# Altium PCB ММС 3К T9M.pcbdoc
Units mm, origin at the board's own origin, x right, y up, seen from the top; angles counter-clockwise.
Board outline 110 x 14 mm, 2 copper layers (Top Layer, Bottom Layer), stack 1.57 mm thick; 122 components, 71 nets, 332 pads, 66 vias.
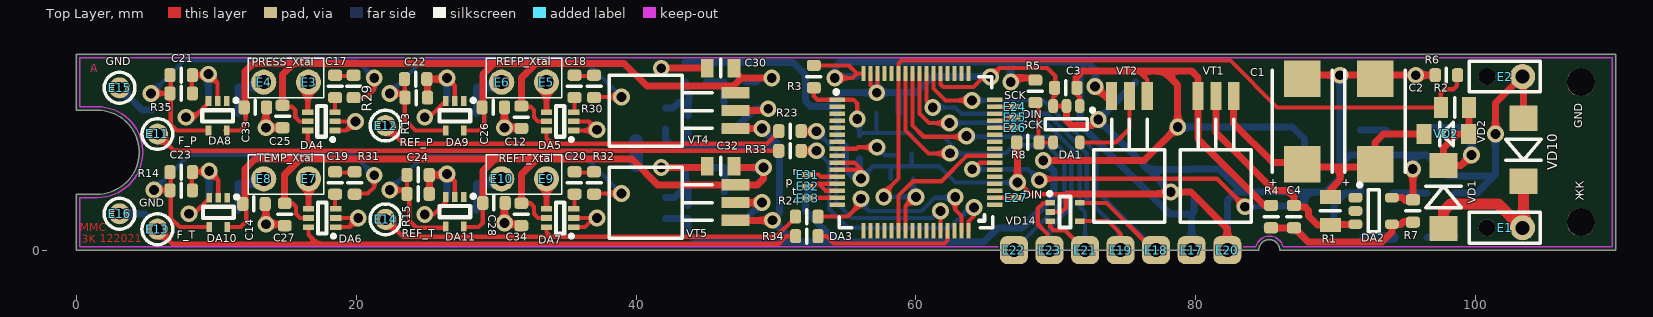
[diagram p0: Top Layer view]
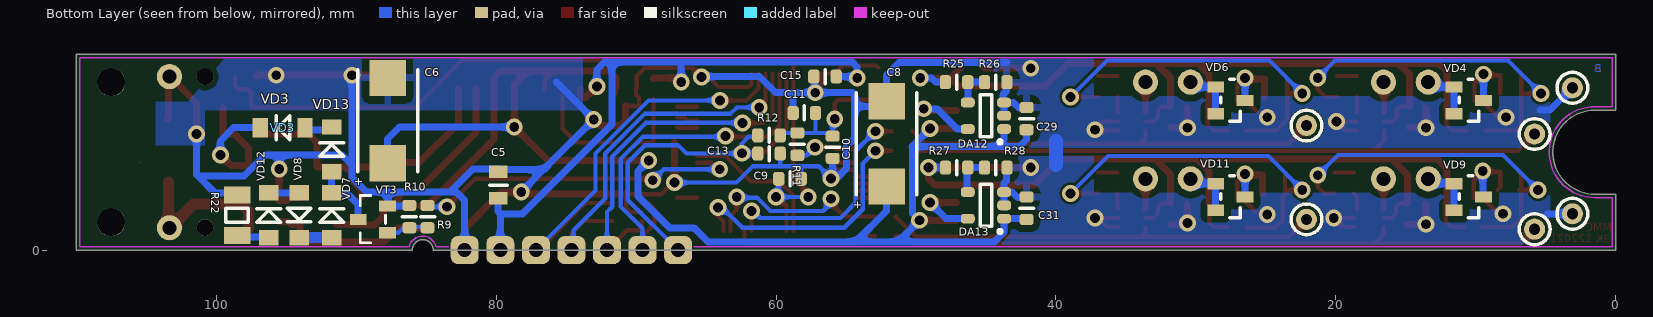
[diagram p1: Bottom Layer view, seen from below]
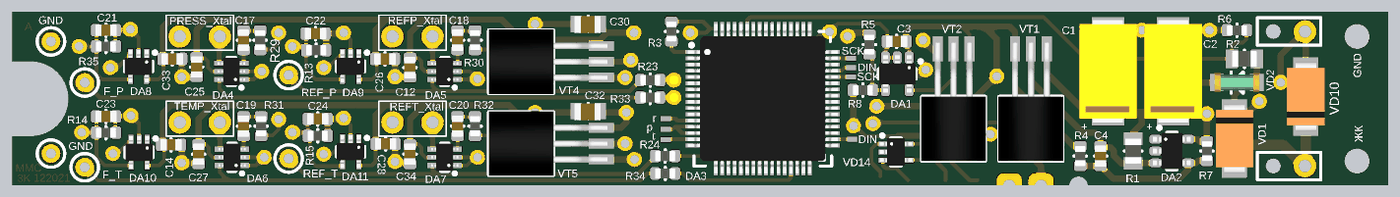
[diagram p2: 3D render of the assembled board from above, using the file's embedded part models]
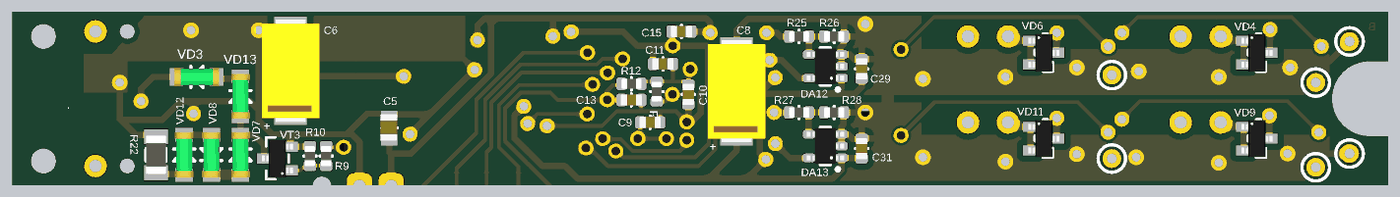
[diagram p3: 3D render of the assembled board from below, using the file's embedded part models]

## Layer stack, top to bottom
Top Solder: solder mask 0.0102, Solder Resist, Dk 3.5
Top Layer: signal copper 0.035
Dielectric1: core 1.5, FR-4, Dk 4.2
Bottom Layer: signal copper 0.035
Bottom Solder: solder mask 0.0102, Solder Resist, Dk 3.5

## Board outline
0,0 0,4 1.5,4 ccw(c1.5,7) 1.5,10 0,10 0,14 110,14 110,0 85.99,0 ccw(c85.24,0) 84.49,0

## Design rules (kind name [scope] priority, off if disabled: settings)
Clearance Clearance_Keepout [OnLayer('Keep-Out Layer')] p1: gap=0.01 ignorepadtopadclearanceinfootprint=FALSE
Clearance Clearance_poly [InNamedPolygon('BOTTOM_GND')] p2: gap=0.35 ignorepadtopadclearanceinfootprint=FALSE except(0.5: SMDPad-Poly)
Clearance Clearance_Top_Bot [(OnLayer('Top Layer') OR OnLayer('Bottom Layer'))] p3: gap=0.2 ignorepadtopadclearanceinfootprint=FALSE except(0: Arc-Hole Track-Hole SMDPad-Hole THPad-Hole Via-Hole Fill-Hole Poly-Hole Region-Hole Text-Hole; 0.5: SMDPad-Fill SMDPad-Poly SMDPad-Region THPad-Fill THPad-Poly THPad-Region)
Clearance Clearance_INTERNAL [(OnLayer('Signal Layer 1') OR OnLayer('Signal Layer 2'))] p4: gap=0.25 ignorepadtopadclearanceinfootprint=FALSE except(0: Arc-Hole Track-Hole SMDPad-Hole THPad-Hole Via-Hole Fill-Hole Poly-Hole Region-Hole Text-Hole)
Clearance "Clearance_Different nets" [All] p5: gap=0.2 ignorepadtopadclearanceinfootprint=FALSE except(0.5: SMDPad-Fill SMDPad-Poly SMDPad-Region)
Clearance "Clearance_Same net" [IsVia vs IsVia] p6: gap=0.3 ignorepadtopadclearanceinfootprint=FALSE except(0: Arc-Hole Track-Hole SMDPad-Hole THPad-Hole Via-Hole Fill-Hole Poly-Hole Region-Hole Text-Hole)
Clearance Clearance_PadtoPad [IsPAD vs IsPad] p7: gap=0.2 ignorepadtopadclearanceinfootprint=FALSE except(0: Arc-Hole Track-Hole SMDPad-Hole THPad-Hole Via-Hole Fill-Hole Poly-Hole Region-Hole Text-Hole)
ComponentClearance [All] p1: gap=0.2 collisioncheckmode=3 verticalgap=0.2 showdistances=FALSE
DiffPairsRouting DiffPairs_100Ohm [InDifferentialPairClass('All Differential Pairs')] p1: maxlimit=0.3 minlimit=0.3 mostfreqgap=0.3 toplayer_minwidth=0.381 toplayer_maxwidth=0.381 toplayer_prefwidth=0.381 bottomlayer_minwidth=0.381 bottomlayer_maxwidth=0.381 bottomlayer_prefwidth=0.381 maxuncoupledlength=12.7 // 100 Ohm differential traces
HoleSize [All] p1: absolutevalues=TRUE maxlimit=3.5 minlimit=0.025 maxpercent=80.000 minpercent=20.000
MinimumAnnularRing [All] p1: minimumring=0.1
MinimumSolderMaskSliver [All] p1 off: minsoldermaskwidth=0.1
PlaneClearance [All] p1: clearance=0.5
PlaneConnect [All] p1: planeconnectstyle=Direct reliefexpansion=0.508 reliefentries=4 reliefconductorwidth=0.254 reliefairgap=0.254
PolygonConnect [All] p1: thpad.connectstyle=Relief thpad.reliefconductorwidth=0.5 thpad.reliefentries=4 thpad.polygonreliefangle="90 Angle" thpad.airgapwidth=0.5 smdpad.connectstyle=Relief smdpad.reliefconductorwidth=0.5 smdpad.reliefentries=4 smdpad.polygonreliefangle="90 Angle" smdpad.airgapwidth=0.5 via.connectstyle=Direct via.reliefconductorwidth=0.254 via.reliefentries=4 via.polygonreliefangle="90 Angle" via.airgapwidth=0.254
RoutingVias [All] p1: holewidth=0.7 width=1.2 viastyle="Through Hole" minholewidth=0.4 minwidth=0.4 maxholewidth=0.8 maxwidth=1.2
SilkToSilkClearance [All] p1 off: silktosilkclearance=0.1
SilkToSolderMaskClearance [IsPad] p1 off: minsilkscreentomaskgap=0.1 clearancetoexposedcopper=TRUE
SolderMaskExpansion [All] p1: expansion=0.025
Width Width_all [All] p1: maxlimit=1 minlimit=0.3 preferedwidth=0.3 minimp=50.000000 maximp=50.000000 favimp=50.000000 // All other trace width
22 further rules are at their usual default settings.

## Components (designator, comment, footprint, x,y, rotation, side; value= is the part's Value field where it differs from the comment)
C1 "10 мкФ" CP7343-31 87.6,9.2 r90 top
C2 "10 мкФ" CP7343-31 92.8,9.2 r90 top
C3 "1 мкФ" CC0603 70.7,11.6 r180 top
C4 "220 пФ" CC0603 87,2.4 r270 top
C5 "4,7 мкФ" CC0805 79.85,4.65 r90 bottom
C6 "100 мкФ" CP7343-31 87.75,9.25 r90 bottom
C8 "100 мкФ" CP7343-31 52.1,7.6 r90 bottom
C9 "220 пФ" CC0603 59,5.1 r180 bottom
C10 "0,1 мкФ" CC0603 55.95,7.35 r270 bottom
C11 "1 мкФ" CC0603 57.975,9.8 r0 bottom
C12 "0,1 мкФ" CC0603 31.8,9.5 r270 top
C13 "0,1 мкФ" CC0603 60.5,6.9 r180 bottom
C14 "0,1 мкФ" CC0603 12.7,3.3 r0 top
C15 "0,1 мкФ" CC0603 56.5,12.4 r0 bottom
C17 "470 пФ" CC0603 18.5,11.7 r90 top
C18 "470 пФ" CC0603 35.6,11.7 r90 top
C19 "470 пФ" CC0603 18.5,4.8 r90 top
C20 "470 пФ" CC0603 35.6,4.8 r90 top
C21 "10 пФ" CC0603 7.5,12.5 r180 top
C22 "10 пФ" CC0603 24.25,12.225 r180 top
C23 "10 пФ" CC0603 7.5,5.575 r180 top
C24 "10 пФ" CC0603 24.425,5.375 r180 top
C25 "0,1 мкФ" CC0603 14.75,9.55 r270 top
C26 "0,1 мкФ" CC0603 29.8,10.2 r0 top
C27 "0,1 мкФ" CC0603 14.9,2.55 r270 top
C28 "0,1 мкФ" CC0603 29.85,3.375 r0 top
C29 "1 мкФ" CC0603 42.1,9.4 r90 bottom
C30 "4,7 мкФ" CC0805 46.05,13 r180 top
C31 "1 мкФ" CC0603 42.1,3 r90 bottom
C32 "4,7 мкФ" CC0805 46.05,6 r180 top
C33 "0,1 мкФ" CC0603 12.8,10.2 r0 top
C34 "0,1 мкФ" CC0603 31.8,2.55 r270 top
DA1 "TPS76901SDBVTEP" SOT23-5 71.7,10.3 r180 top
DA2 "TLVH431BQDBVRQ1" SOT23-5 91.4,3.75 r270 top
DA3 "MSP430F2619SPM" "LQFP64_SMALL PADS" 60,7 r0 top
DA4 "74AUP1Z04GW" SC70-6 18.5,8.55 r90 top
DA5 "74AUP1Z04GW" SC70-6 35.55,8.55 r90 top
DA6 "74AUP1Z04GW" SC70-6 18.55,1.65 r90 top
DA7 "74AUP1Z04GW" SC70-6 35.55,1.65 r90 top
DA8 "74AUP1G04GW" SC70-5 10.75,10.65 r180 top
DA9 "74AUP1G04GW" SC70-5 27.7,10.65 r180 top
DA10 "74AUP1G04GW" SC70-5 10.8,3.75 r180 top
DA11 "74AUP1G04GW" SC70-5 27.7,3.8 r180 top
DA12 "TPS76901SDBVTEP" SOT23-5 43.7,8.65 r90 bottom
DA13 "TPS76901SDBVTEP" SOT23-5 43.7,2.25 r90 bottom
E1 "ЖК" Holes_x2 103.34,1.6 r90 top
E2 "GND" Holes_x2 103.34,12.4 r90 top
E3 "PRESS_X1" "HOLES_1 mm" 16.6,12 r180 top
E4 "PRESS_Xtal" "HOLES_1 mm" 13.4,12 r180 top
E5 "REF_X1" "HOLES_1 mm" 33.6,12 r90 top
E6 "REFP_Xtal" "HOLES_1 mm" 30.4,12 r90 top
E7 "TEMP_X1" "HOLES_1 mm" 16.6,5.1 r90 top
E8 "TEMP_Xtal" "HOLES_1 mm" 13.4,5.1 r90 top
E9 "REF_X1" "HOLES_1 mm" 33.6,5.1 r90 top
E10 "REFT_Xtal" "HOLES_1 mm" 30.4,5.1 r90 top
E11 "F_P" KT08X15 5.8,8.3 r0 top
E12 "REF_P" KT08X15 22.1,8.9 r0 top
E13 "F_T" KT08X15 5.8,1.5 r0 top
E14 "REF_T" KT08X15 22.1,2.2 r0 top
E15 "GND" KT08X15 3.1,11.6 r0 top
E16 "GND" KT08X15 3.1,2.6 r0 top
E17 "KP" "EDGE HOLE"#1 94.3,-3.8 r0 top
E18 "KP" "EDGE HOLE"#2 91.7,-5.75 r0 top
E19 "KP" "EDGE HOLE"#3 88.9,-5.625 r0 top
E20 "KP" "EDGE HOLE"#1 96.84,-3.8 r0 top
E21 "KP" "EDGE HOLE"#4 86.375,-5.675 r0 top
E22 "KP" "EDGE HOLE"#5 81.15,-5.725 r0 top
E23 "KP" "EDGE HOLE"#6 83.9,-5.825 r0 top
E24 "SCK" 0.4x0.8mm 67.05,10.25 r180 top
E25 "DIN" 0.4x0.8mm 67.05,9.5 r180 top
E26 "SCK" 0.4x0.8mm 67.05,8.75 r180 top
E27 "DIN" 0.4x0.8mm 67.15,3.75 r180 top
E31 "r" 0.4x0.8mm 52.25,5.4 r180 top
E32 "p" 0.4x0.8mm 52.25,4.55 r180 top
E33 "t" 0.4x0.8mm 52.25,3.725 r180 top
R1 "47 к" RC0805 89.6,2.8 r90 top
R2 "130 к" RC0805 98.5,10.2 r0 top
R3 "12" RC0603 52.7,12.4 r270 top
R4 "300 к" RC0603 85.375,2.4 r90 top
R5 "330 к" RC0603 68.525,11.35 r90 top
R6 "10 к" RC0603 97.9,12.5 r0 top
R7 "100 к" RC0603 95.5,2.8 r270 top
R8 "180 к" RC0603 68,7.7 r0 top
R9 "100" RC0603 84.9,2.4 r270 bottom
R10 "47 к" RC0603 86.2,2.4 r270 bottom
R11 "100 к" RC0603 58.475,7.575 r270 bottom
R12 "100 к" RC0603 60.5,8.2 r180 bottom
R13 "300 к" RC0603 24.3,10.9 r180 top
R14 "300 к" RC0603 7.5,4.275 r180 top
R15 "300 к" RC0603 24.425,4.025 r180 top
R22 "3,3 к" RES_1206 98.5,2.5 r270 bottom
R23 "4,7 к" RC0603 51,8.5 r0 top
R24 "4,7 к" RC0603 52.2,2.4 r0 top
R25 "330 к" RC0603 47.1,12 r0 bottom
R26 "180 к" RC0603 44.3,12 r0 bottom
R27 "330 к" RC0603 47.1,5.9 r0 bottom
R28 "180 к" RC0603 44.3,5.9 r0 bottom
R29 "5,1 к" RC0603 19.825,11.7 r270 top
R30 "5,1 к" RC0603 37,11.7 r270 top
R31 "5,1 к" RC0603 19.9,4.8 r270 top
R32 "5,1 к" RC0603 37,4.8 r270 top
R33 "4,7 к" RC0603 51,7.1 r0 top
R34 "4,7 к" RC0603 52.2,1 r0 top
R35 "300 к" RC0603 7.5,11.2 r180 top
VD1 "#NAME?" SMA(DO-214AC) 97.7,3.8 r90 top
VD2 "#NAME?" MiniMELF(SOD-80) 97.9,8.3 r180 top
VD3 "TZMC6V8" MiniMelf 95.25,8.75 r0 bottom
VD4 "BAS40-04,215" SOT23-3#1 10.5,10.7 r270 bottom
VD6 "BAS40-04,215" SOT23-3#1 27.538,10.7 r270 bottom
VD7 "TZMC3V3" MiniMelf 91.75,2.5 r90 bottom
VD8 "TZMC3V3" MiniMelf 94.075,2.5 r270 bottom
VD9 "BAS40-04,215" SOT23-3#1 10.5,3.8 r270 bottom
VD10 "SMAJ33A-TR" SMA(DO-214AC) 103.4,7.175 r270 top
VD11 "BAS40-04,215" SOT23-3#1 27.538,3.8 r270 bottom
VD12 "TZMC3V3" MiniMelf 96.25,2.5 r90 bottom
VD13 "TZMC6V8" MiniMelf 91.75,7.2 r90 bottom
VD14 "PESD3V3L4UG,115" SC70-5 69.6,3.375 r270 top
VT1 "#NAME?" TO92GOR 81.43,11 r0 top
VT2 "#NAME?" TO92GOR 75.25,11 r0 top
VT3 "ValueSch" SOT23-3#2 88.8,2.2 r90 bottom
VT4 "#NAME?" TO92GOR 47.1,9.97 r270 top
VT5 "#NAME?" TO92GOR 47.1,3.4 r270 top

## Footprints (in the part's own frame and the unit in brackets; to place one, negate y for a bottom-side part, rotate by r counter-clockwise, add the part's x,y. Pads: shape width x height; smd on the part's side, far side on the other; paste and mask are expansions set on the pad)
0.4x0.8mm [mm]
  rect 0.8x0.4 smd mask+0.07: 1(0,0)
CC0603 [mm]
  rrect50% 0.8x1 smd mask+0.07: 1(-0.8,0) 2(0.8,0)
  silkscreen extent 0,-0.5 0,0.5, body extent -0.85,-0.45 0.85,0.45, height 0.5
CC0805 [mm]
  rect 0.9x1.3 smd: 1(-0.95,0) 2(0.95,0)
  Top Layer pour cut-out: -0.5,0.95 0.5,0.95 0.5,-0.95 -0.5,-0.95
  silkscreen extent 0,-0.64 0,0.62, body extent -1,-0.63 1.1,0.72, height 0.7
CP7343-31 [mm]
  rect 2.6x2.6 smd: 1(-3.05,0) 2(3.05,0)
  silkscreen extent -3.65,-2.15 3.65,2.15, body extent -4.1,-2.3 4.1,2.3, height 3.2
"EDGE HOLE"#1 [mm]
  rrect50% 2x2 hole 1 mask+0.07: 1(-14.6,3.8)
"EDGE HOLE"#2 [mm]
  rrect50% 2x2 hole 1 mask+0.07: 1(-14.54,5.75)
"EDGE HOLE"#3 [mm]
  rrect50% 2x2 hole 1 mask+0.07: 1(-14.28,5.625)
"EDGE HOLE"#4 [mm]
  rrect50% 2x2 hole 1 mask+0.07: 1(-14.295,5.675)
"EDGE HOLE"#5 [mm]
  rrect50% 2x2 hole 1 mask+0.07: 1(-14.15,5.725)
"EDGE HOLE"#6 [mm]
  rrect50% 2x2 hole 1 mask+0.07: 1(-14.36,5.825)
"HOLES_1 mm" [mm]
  round 1.8 hole 1 mask+0.07: 1(0,0)
Holes_x2 [mm]
  round 1.8 hole 1 mask+0.07: 1(0,0)
  round 1.2 hole 1.2 unplated: 2(0,2.54)
  silkscreen extent -1.1,-1.27 1.1,3.81
KT08X15 [mm]
  round 1.5 hole 0.8 mask+0.07: 1(0,0)
  silkscreen extent -1.1,-1.1 1.1,1.1
"LQFP64_SMALL PADS" [mm]
  rect 1.1x0.3 smd: 1(-5.625,3.75) 2(-5.625,3.25) 3(-5.625,2.75) 4(-5.625,2.25) 5(-5.625,1.75) 6(-5.625,1.25) 7(-5.625,0.75) 8(-5.625,0.25) 9(-5.625,-0.25) 10(-5.625,-0.75) 11(-5.625,-1.25) 12(-5.625,-1.75) 13(-5.625,-2.25) 14(-5.625,-2.75) 15(-5.625,-3.25) 16(-5.625,-3.75) 33(5.625,-3.75) 34(5.625,-3.25) 35(5.625,-2.75) 36(5.625,-2.25) 37(5.625,-1.75) 38(5.625,-1.25) 39(5.625,-0.75) 40(5.625,-0.25) 41(5.625,0.25) 42(5.625,0.75) 43(5.625,1.25) 44(5.625,1.75) 45(5.625,2.25) 46(5.625,2.75) 47(5.625,3.25) 48(5.625,3.75)
  rect 0.3x1.1 smd: 17(-3.75,-5.625) 18(-3.25,-5.625) 19(-2.75,-5.625) 20(-2.25,-5.625) 21(-1.75,-5.625) 22(-1.25,-5.625) 23(-0.75,-5.625) 24(-0.25,-5.625) 25(0.25,-5.625) 26(0.75,-5.625) 27(1.25,-5.625) 28(1.75,-5.625) 29(2.25,-5.625) 30(2.75,-5.625) 31(3.25,-5.625) 32(3.75,-5.625) 49(3.75,5.625) 50(3.25,5.625) 51(2.75,5.625) 52(2.25,5.625) 53(1.75,5.625) 54(1.25,5.625) 55(0.75,5.625) 56(0.25,5.625) 57(-0.25,5.625) 58(-0.75,5.625) 59(-1.25,5.625) 60(-1.75,5.625) 61(-2.25,5.625) 62(-2.75,5.625) 63(-3.25,5.625) 64(-3.75,5.625)
  silkscreen extent -5.82,-4.9 4.9,4.42, body extent -6,-6 6,6, height 1.47
MiniMelf [mm]
  rect 1.1x1.4 smd: 1(-1.6,0) 2(1.6,0)
  silkscreen extent -0.5,-0.85 0.46,0.85, body extent -1.8,-0.75 1.8,0.75, height 1.5
MiniMELF(SOD-80) [mm]
  rect 1.1x1.4 smd: 1(-1.6,0) 2(1.6,0)
  silkscreen extent -0.5,-0.85 0.46,0.85, body extent -1.8,-0.75 1.8,0.75, height 1.5
RC0603 [mm]
  rrect50% 0.8x1 smd mask+0.07: 1(-0.8,0) 2(0.8,0)
  silkscreen extent 0,-0.5 0,0.5, body extent -0.8,-0.4 0.8,0.4, height 0.45
RC0805 [mm]
  rect 1x1.5 smd: 1(-1,0) 2(1,0)
  Top Layer pour cut-out: -0.5,1.05 0.5,1.05 0.5,-1.05 -0.5,-1.05
  silkscreen extent 0,-0.7 0,0.7, body extent -1,-0.62 1,0.63, height 0.5
RES_1206 [mm]
  rect 1.2x1.9 smd mask+0.07: 1(-1.45,0) 2(1.45,0)
  silkscreen extent -0.5,-0.8 0.5,0.8, body extent -1.55,-0.8 1.55,0.8, height 0.6
SC70-5 [mm]
  rect 0.4x0.7 smd mask+0.07: 1(0,0) 2(0.65,0) 3(1.3,0) 4(1.3,2.1) 5(0,2.1)
  silkscreen extent -0.77,-0.16 1.75,1.45, body extent -0.45,-0.25 1.75,2.35, height 1.11
SC70-6 [mm]
  rect 0.4x0.8 smd mask+0.07: 1(0,0) 2(0.65,0) 3(1.3,0) 4(1.3,1.95) 5(0.65,1.95) 6(0,1.95)
  silkscreen extent -0.75,0.08 1.75,1.27, body extent -0.45,-0.13 1.75,2.07, height 0.91
SMA(DO-214AC) [mm]
  rect 1.8x2 smd: 1(-2.25,0) 2(2.25,0)
  silkscreen extent -0.76,-1.27 0.76,1.27, body extent -2.8,-1.5 2.8,1.5, height 2.2
SOT23-3#1 [mm] "SOT23, 3 pin"
  rect 0.8x1.2 smd mask+0.07: 1(-0.95,-1.05) 2(0.95,-1.05) 3(0,1.05)
  silkscreen extent -1.53,-0.7 1.5,0.7, body extent -1.5,-1.25 1.5,1.25, height 1.1
SOT23-3#2 [mm]
  rect 0.8x1.2 smd mask+0.07: 1(-0.95,-1.05) 2(0.95,-1.05) 3(0,1.05)
  Top Layer pour cut-out: -1.35,-1.65 -1.35,1.65 1.35,1.65 1.35,-1.65
  silkscreen extent -1.67,-0.9 1.7,0.9, body extent -1.5,-1.25 1.5,1.25, height 1.1
SOT23-5 [mm]
  rrect70% 0.7x1 smd mask+0.07: 1(0,0) 2(0.95,0) 3(1.9,0) 4(1.9,2.6) 5(0,2.6)
  silkscreen extent -1.02,0.19 2.45,1.7, body extent -0.5,-0.2 2.4,2.8, height 1.46
TO92GOR [mm]
  rect 0.8x2 smd: 1(-1.27,0) 2(0,0) 3(1.27,0)
  silkscreen extent -2.54,-9.02 2.54,-1.65, body extent -2.58,-9.01 2.58,0.5, height 4.18

## Part data
C1 C2: library part IDCTant0001, "Танталовый чип конденсатор D Case; 10 мкФ; 10%; 50 В; -55..+150", Manufacturer=KEMET, Package, in="D Case", PartNumber=T498D106K050ATE1K0, Temperature=-55..+150, Tolerance=10%, ValueBOM="Конденсатор T498D106K050ATE1K0 KEMET", Voltage, V=50, BOM="Танталовый чип конденсатор D Case; 10 мкФ; 10%; 50 В; -55..+150", ID=IDCTant0001
C3 C11 C29 C31: library part IDC06030017, "Керамический чип конденсатор 0603; 1 мкФ; 10%; 16 В; X8L; -55..+150", Manufacturer=TDK, Package, in=0603, PartNumber=C1608X8L1C105K080AC, TCC (Dielectric type)=X8L, Temperature=-55..+150, Tolerance=10%, ValueBOM="Конденсатор C1608X8L1C105K080AC TDK", Voltage, V=16, BOM="Керамический чип конденсатор 0603; 1 мкФ; 10%; 16 В; X8L; -55..+150", ID=IDC06030017
C4 C9: library part IDC06030018, "Керамический чип конденсатор 0603; 220 пФ; 5%; 50 В; NP0; -55..+150", Manufacturer=TDK, Package, in=0603, PartNumber=CGA3E2NP01H221J080AA, TCC (Dielectric type)=NP0, Temperature=-55..+150, Tolerance=5%, ValueBOM="Конденсатор CGA3E2NP01H221J080AA TDK", Voltage, V=50, BOM="Керамический чип конденсатор 0603; 220 пФ; 5%; 50 В; NP0; -55..+150", ID=IDC06030018
C5 C30 C32: library part IDC08050013, "Керамический чип конденсатор 0805; 4,7 мкФ; 10%; 16 В; X8L; -55..+150", Manufacturer=TDK, Package, in=0805, PartNumber=C2012X8L1C475K125AC, TCC (Dielectric type)=X8L, Tolerance=10%, ValueBOM="Конденсатор C2012X8L1C475K125AC TDK", Voltage, V=16, BOM="Керамический чип конденсатор 0805; 4,7 мкФ; 10%; 16 В; X8L; -55..+150", F10=-55..+150, ID=IDC08050013
C6 C8: library part IDCTant0002, "Танталовый чип конденсатор D Case; 100 мкФ; 10%; 10 В; -55..+150", Manufacturer=KEMET, Package, in="D Case", PartNumber=T498D107K010ATE600, Temperature=-55..+150, Tolerance=10%, ValueBOM="Конденсатор T498D107K010ATE600 KEMET", Voltage, V=10, BOM="Танталовый чип конденсатор D Case; 100 мкФ; 10%; 10 В; -55..+150", ID=IDCTant0002
C10 C12 C13 C14 C15 C25 C26 C27 C28 C33 C34: library part IDC06030020, "Керамический чип конденсатор 0603; 0,1 мкФ; 10%; 25 В; X8R; -55..+150", Manufacturer=TDK, Package, in=0603, PartNumber=CGA3E2X8R1E104K080AE, TCC (Dielectric type)=X8R, Temperature=-55..+150, Tolerance=10%, ValueBOM="Конденсатор CGA3E2X8R1E104K080AE TDK", Voltage, V=25, BOM="Керамический чип конденсатор 0603; 0,1 мкФ; 10%; 25 В; X8R; -55..+150", ID=IDC06030020
C17 C18 C19 C20: library part IDC06030021, "Керамический чип конденсатор 0603; 470 пФ; 1%; 100 В; C0G; -55..+125", Manufacturer=MURATA, Package, in=0603, PartNumber=GCM1885C2A471FA16D, TCC (Dielectric type)=C0G, Temperature=-55..+125, Tolerance=1%, ValueBOM="Конденсатор GCM1885C2A471FA16D MURATA", Voltage, V=100, BOM="Керамический чип конденсатор 0603; 470 пФ; 1%; 100 В; C0G; -55..+125", ID=IDC06030021
C21 C22 C23 C24: library part IDC06030022, "Керамический чип конденсатор 0603; 10 пФ; 5%; 50 В; C0G; -55..+125", Manufacturer=TDK, Package, in=0603, PartNumber=CGA3E2C0G1H100D080AA, TCC (Dielectric type)=C0G, Temperature=-55..+125, Tolerance=5%, ValueBOM="Конденсатор CGA3E2C0G1H100D080AA TDK", Voltage, V=50, BOM="Керамический чип конденсатор 0603; 10 пФ; 5%; 50 В; C0G; -55..+125", ID=IDC06030022
DA1 DA12 DA13: library part LDO0006, "Линейный понижающий стабилизатор регулируемый 1.2..4.5В ; Uвх 5..10В; Iвых 100 mA; -50..+150; SOT23-5", Manufacturer="Texas Instruments", Package=SOT23-5, Temperature=-55..+150, ValueBOM="Микросхема TPS76901SDBVTEP Texas Instruments", BOM="Линейный понижающий стабилизатор регулируемый 1.2..4.5В ; Uвх 5..10В; Iвых 100 mA; -50..+150; SOT23-5", ID=LDO0006, PartNumber=TPS76901SDBVTEP, ValueSch=TPS76901SDBVTEP
DA2: library part LDO0007, "Линейный понижающий стабилизатор регулируемый 1.24..18В ; -50..+125; SOT23-5", Manufacturer="Texas Instruments", Package=SOT23-5, Temperature=-55..+125, ValueBOM="Микросхема TLVH431BQDBVRQ1 Texas Instruments", BOM="Линейный понижающий стабилизатор регулируемый 1.24..18В ; -50..+125; SOT23-5", ID=LDO0007, PartNumber=TLVH431BQDBVRQ1, ValueSch=TLVH431BQDBVRQ1
DA3: library part MCU0003, "Микроконтроллер 16 бит; 120 кБ flash; 4 кБ RAM; 12-Bit ADC; Dual DAC; 2 USCI; DMA; LQFP-64; -55..+150", Manufacturer="Texas Instruments", Package=LQFP-64, ValueBOM="Микросхема MSP430F2619SPM Texas Instruments", BOM="Микроконтроллер 16 бит; 120 кБ flash; 4 кБ RAM; 12-Bit ADC; Dual DAC; 2 USCI; DMA; LQFP-64; -55..+150", ID=MCU0003, PartNumber=MSP430F2619SPM, ValueSch=MSP430F2619SPM
DA4 DA5 DA6 DA7: library part IDLOGIC0003, "Драйвер кварцевого резонатора;  0,8..3,6В; 70 МГц; -40..+125; TSSOP6", Manufacturer=Nexperia, Package=TSSOP6(SC70-6), ValueBOM="Микросхема 74AUP1Z04GW Nexperia", ValueSch=74AUP1G04GW, BOM="Драйвер кварцевого резонатора;  0,8..3,6В; 70 МГц; -40..+125; TSSOP6", ID=IDLOGIC0003, PartNumber=74AUP1Z04GW
DA8 DA9 DA10 DA11: library part IDLOGIC0002, "Одиночный инвертор; 0,8..3,6В; 70 МГц; -40..+125; TSSOP5", Manufacturer=Nexperia, Package=TSSOP5, ValueBOM="Микросхема 74AUP1G04GW Nexperia", BOM="Одиночный инвертор; 0,8..3,6В; 70 МГц; -40..+125; TSSOP5", ID=IDLOGIC0002, PartNumber=74AUP1G04GW, ValueSch=74AUP1G04GW
E1 E2 E24 E25 E26 E27 E31 E32 E33: library part KP
E3 E4 E5 E6 E7 E8 E9 E10: Part Number=1KPBIG, ValueBOM="Контактная площадка", ValueSch="Розетка 1KPBIG", Type=X, КЛАСС=Розетка, ТИП=1KPBIG
E11 E12 E13 E14 E15 E16: library part KP_3, "КП"
R1: library part IDR08050004, "Чип резистор 0805; 47 кОм; 1%; 100 В; 0,125", Manufacturer=Yageo, Package, in=0805, PartNumber=RC0805FR-0747KL, Power, W=0,125, Tolerance=1%, ValueBOM="Чип резистор RC0805FR-0747KL Yageo", Voltage, V=100, BOM="Чип резистор 0805; 47 кОм; 1%; 100 В; 0,125", HelpURL=https://www.yageo.com/upload/media/product/products/datasheet/rchip/PYu-RC_Group_51_RoHS_L_11.pdf, ID=IDR08050004, TCR (ppm/°C)=100
R2: library part IDR08050005, "Чип резистор 0805; 130 кОм; 1%; 100 В; 0,125", Manufacturer=Yageo, Package, in=0805, PartNumber=RC0805FR-07130KL, Power, W=0,125, Tolerance=1%, ValueBOM="Чип резистор RC0805FR-07130KL Yageo", Voltage, V=100, BOM="Чип резистор 0805; 130 кОм; 1%; 100 В; 0,125", HelpURL=https://www.yageo.com/upload/media/product/products/datasheet/rchip/PYu-RC_Group_51_RoHS_L_11.pdf, ID=IDR08050005, TCR (ppm/°C)=100
R3: library part IDR06030009, "Чип резистор 0603; 12Ом; 1%; 50 В; 0,1", Manufacturer=Yageo, Package, in=0603, PartNumber=RC0603FR-0712RL, Power, W=0,1, Tolerance=1%, ValueBOM="Чип резистор RC0603FR-0712RL Yageo", Voltage, V=50, BOM="Чип резистор 0603; 12Ом; 1%; 50 В; 0,1", ID=IDR06030009, TCR (ppm/°C)=100
R4 R13 R14 R15 R35: library part IDR06030017, "Чип резистор 0603; 300 кОм; 1%; 50 В; 0,1", Manufacturer=Yageo, Package, in=0603, PartNumber=RC0603FR-07300KL, Power, W=0,1, Tolerance=1%, ValueBOM="Чип резистор RC0603FR-07300KL Yageo", Voltage, V=50, BOM="Чип резистор 0603; 300 кОм; 1%; 50 В; 0,1", ID=IDR06030017, TCR (ppm/°C)=100
R5 R25 R27: library part IDR06030011, "Чип резистор 0603; 330 кОм; 1%; 50 В; 0,1", Manufacturer=Yageo, Package, in=0603, PartNumber=RC0603FR-07330KL, Power, W=0,1, Tolerance=1%, ValueBOM="Чип резистор RC0603FR-07330KL Yageo", Voltage, V=50, BOM="Чип резистор 0603; 330 кОм; 1%; 50 В; 0,1", ID=IDR06030011, TCR (ppm/°C)=100
R6: library part IDR06030012, "Чип резистор 0603; 10 кОм; 1%; 50 В; 0,1", Manufacturer=Yageo, Package, in=0603, PartNumber=RC0603FR-0710KL, Power, W=0,1, Tolerance=1%, ValueBOM="Чип резистор RC0603FR-0710KL Yageo", Voltage, V=50, BOM="Чип резистор 0603; 10 кОм; 1%; 50 В; 0,1", ID=IDR06030012, TCR (ppm/°C)=100
R7 R11 R12: library part IDR06030013, "Чип резистор 0603; 100 кОм; 1%; 50 В; 0,1", Manufacturer=Yageo, Package, in=0603, PartNumber=RC0603FR-07100KL, Power, W=0,1, Tolerance=1%, ValueBOM="Чип резистор RC0603FR-07100KL Yageo", Voltage, V=50, BOM="Чип резистор 0603; 100 кОм; 1%; 50 В; 0,1", ID=IDR06030013, TCR (ppm/°C)=100
R8 R26 R28: library part IDR06030014, "Чип резистор 0603; 180 кОм; 1%; 50 В; 0,1", Manufacturer=Yageo, Package, in=0603, PartNumber=RC0603FR-07180KL, Power, W=0,1, Tolerance=1%, ValueBOM="Чип резистор RC0603FR-07180KL Yageo", Voltage, V=50, BOM="Чип резистор 0603; 180 кОм; 1%; 50 В; 0,1", ID=IDR06030014, TCR (ppm/°C)=100
R9: library part IDR06030015, "Чип резистор 0603; 100Ом; 1%; 50 В; 0,1", Manufacturer=Yageo, Package, in=0603, PartNumber=RC0603FR-07100RL, Power, W=0,1, Tolerance=1%, ValueBOM="Чип резистор RC0603FR-07100RL Yageo", Voltage, V=50, BOM="Чип резистор 0603; 100Ом; 1%; 50 В; 0,1", ID=IDR06030015, TCR (ppm/°C)=100
R10: library part IDR06030016, "Чип резистор 0603; 47 кОм; 1%; 50 В; 0,1", Manufacturer=Yageo, Package, in=0603, PartNumber=RC0603FR-0747KL, Power, W=0,1, Tolerance=1%, ValueBOM="Чип резистор RC0603FR-0747KL Yageo", Voltage, V=50, BOM="Чип резистор 0603; 47 кОм; 1%; 50 В; 0,1", ID=IDR06030016, TCR (ppm/°C)=100
R22: library part IDR12060001, "Чип резистор 1206; 3,3 кОм; 5%; 200 В; 0,25", Manufacturer=Yageo, Package, in=1206, PartNumber=RC1206JR-073K3L, Power, W=0,25, Tolerance=5%, ValueBOM="Чип резистор RC1206JR-073K3L Yageo", Voltage, V=200, BOM="Чип резистор 1206; 3,3 кОм; 5%; 200 В; 0,25", ID=IDR12060001, TCR (ppm/°C)=100
R23 R24 R33 R34: library part IDR06030018, "Чип резистор 0603; 4,7 кОм; 1%; 50 В; 0,1", Manufacturer=Yageo, Package, in=0603, PartNumber=RC0603FR-074K7L, Power, W=0,1, Tolerance=1%, ValueBOM="Чип резистор RC0603FR-074K7L Yageo", Voltage, V=50, BOM="Чип резистор 0603; 4,7 кОм; 1%; 50 В; 0,1", ID=IDR06030018, TCR (ppm/°C)=100
R29 R30 R31 R32: library part IDR06030019, "Чип резистор 0603; 5,1 кОм; 1%; 50 В; 0,1", Manufacturer=Yageo, Package, in=0603, PartNumber=RC0603FR-075K1L, Power, W=0,1, Tolerance=1%, ValueBOM="Чип резистор RC0603FR-075K1L Yageo", Voltage, V=50, BOM="Чип резистор 0603; 5,1 кОм; 1%; 50 В; 0,1", ID=IDR06030019, TCR (ppm/°C)=100
VD1: library part VD000001, "Диод If=1 А; Ur = 700В; SMA; -65C..+150C", Current=1, Manufacturer="Diodes Incorporated", Package, in=SMA, PartNumber=US1M-13-F, Reverce Voltage, V=700, Temperature=-65C..+150C, ValueBOM="Диод US1M-13-F Diodes Incorporated", BOM="Диод If=1 А; Ur = 700В; SMA; -65C..+150C", ID=VD000001
VD2: library part VD000002, "Диод If=0,5 А; Ur = 75В; MiniMELF; -65C..+175C", Current=0,5, Manufacturer=VISHAY, Package, in=MiniMELF, PartNumber=LL4148, Reverce Voltage, V=75, Temperature=-65C..+175C, ValueBOM="Диод LL4148 VISHAY", BOM="Диод If=0,5 А; Ur = 75В; MiniMELF; -65C..+175C", ID=VD000002
VD3 VD13: library part VDZn0001, "Стабилитрон Iст=5 мА; Uст = 6,8В; MiniMELF; -65C..+175C", Current=5, Manufacturer=VISHAY, Package, in=MiniMELF, Temperature=-65C..+175C, ValueBOM="Стабилитрон TZMC6V8 VISHAY", Voltage, V=6,8, BOM="Стабилитрон Iст=5 мА; Uст = 6,8В; MiniMELF; -65C..+175C", ID=VDZn0001, PartNumber=TZMC6V8
VD4 VD6 VD9 VD11: library part VDSH0003, "Диод Шоттки сдвоенный If=0,12 А; Ur = 40В; SOT23; -65C..+150C", Current=0,12, Manufacturer=Nexperia, Package, in=SOT23, Reverce Voltage, V=40, Temperature=-65C..+150C, ValueBOM="Диод Шоттки сдвоенный BAS40-04,215 Nexperia", BOM="Диод Шоттки сдвоенный If=0,12 А; Ur = 40В; SOT23; -65C..+150C", ID=VDSH0003, PartNumber=BAS40-04,215
VD7 VD8 VD12: library part VDZn0002, "Стабилитрон Iст=5 мА; Uст = 3,3В; MiniMELF; -65C..+175C", Current=5, Manufacturer=VISHAY, Package, in=MiniMELF, Temperature=-65C..+175C, ValueBOM="Стабилитрон TZMC3V3 VISHAY", Voltage, V=3,3, BOM="Стабилитрон Iст=5 мА; Uст = 3,3В; MiniMELF; -65C..+175C", ID=VDZn0002, PartNumber=TZMC3V3
VD10: library part VDTVS0004, "Однонаправленый TVS диод If= А; Ur = 33В; SMA(DO-214AC); -55C..+150C", Manufacturer="ST Microelectronics", Package, in=SMA(DO-214AC), Reverce Voltage, V=33, Temperature=-55C..+150C, ValueBOM="TVS диод SMAJ33A-TR ST Microelectronics", BOM="Однонаправленый TVS диод If= А; Ur = 33В; SMA(DO-214AC); -55C..+150C", ID=VDTVS0004, PartNumber=SMAJ33A-TR
VD14: library part VDTVS0005, "Однонаправленый TVS диод If= А; Ur = 3,3В; SOT353; -65C..+150C", Manufacturer=Nexperia, Package, in=SOT353, Reverce Voltage, V=3,3, Temperature=-65C..+150C, ValueBOM="TVS диод PESD3V3L4UG,115 Nexperia", BOM="Однонаправленый TVS диод If= А; Ur = 3,3В; SOT353; -65C..+150C", ID=VDTVS0005, PartNumber=PESD3V3L4UG,115
VT1 VT2 VT4 VT5: library part IDBIPOLAR0001, "Транзистор биполярный NPN; U=400 В;  I=0,5 А; TO92; -55С..+200С", Current, A=0,5, Manufacturer="Diodes Inc", Package=TO92, PartNumber=ZTX658, Temperature=-55С..+200С, ValueBOM="Транзистор ZTX658 Diodes Inc", Voltage, V=400, BOM="Транзистор биполярный NPN; U=400 В;  I=0,5 А; TO92; -55С..+200С", Channel=NPN, ID=IDBIPOLAR0001
VT3: library part IDMOSFET0002, "Транзистор MOSFET N-channel; U=60 В; R=0,245 Ом; I=4 А; SOT-23; -55С..+175С", Current, A=4, Manufacturer=Vishay, Package=SOT-23, PartNumber=SQ2364EES, Temperature=-55С..+175С, ValueBOM="Транзистор SQ2364EES Vishay", Voltage, V=60, BOM="Транзистор MOSFET N-channel; U=60 В; R=0,245 Ом; I=4 А; SOT-23; -55С..+175С", Channel=N, ID=IDMOSFET0002, Rds, Ohm=0,245

## Free pads (board coordinates)
  round 2 hole 2 unplated: 1(107.5,2) 1(107.5,12)

## Via types
v1: diameter 1.2, hole 0.7, Top Layer to Bottom Layer, 66 vias

## Nets (pads, with @x,y where several pads share a name; then routed paths per layer and width w, separated by ;. In a path a pad name is that pad's centre, name@x,y a point inside that pad or via, vN(x,y) a via of type N, cw(c..) or ccw(c..) an arc to the next point about the centre after c; other vN are vias at no path point)
3V3_A: C5.1 C15.1 DA3.64 E17.1 R3.1 R5.2 VT2.1 | length 52.5
  Top Layer w0.3: R3.1@52.7,13.05 52.85,13.2 55.2,13.2 55.775,12.625 ; v1(54.2,12.3) 55.45,12.3 55.775,12.625 ; DA3.64 55.775,12.625
  Top Layer w0.5: v1(66.775,12.015) 67.06,12.3 68.725,12.3 R5.2@68.75,12.275 ; v1(72.8,11.7) 73.6,10.9 73.88,10.9 VT2.1 VT2.1@73.98,11.5
  Bottom Layer w0.5: C15.1@55.75,12.4 C15.1 54.3,12.4 v1(54.2,12.3) 54.2,13.1 54.54,13.44 66.8,13.44 ; v1(66.775,12.015) 66.775,13.415 66.8,13.44 ; v1(72.8,11.7) 72.8,12.9 72.26,13.44 71.735,13.44 ; E17.1 79.7,2.6 ; C5.1 79.85,2.75 79.7,2.6 ; 66.8,13.44 71.735,13.44 ; 71.735,13.44 71.735,8.965 78.1,2.6 79.7,2.6
3V3_D: C10.1 C11.1 DA3.1 R3.2 R11.1 R12.2 | length 11.7
  Top Layer w0.3: R3.2@52.7,11.65 R3.2 52.7,11 52.95,10.75 DA3.1 55.525,10.75 55.8,10.475 v1(55.8,9.375)
  Bottom Layer w0.3: v1(55.8,9.375) 55.95,9.225 C10.1 56.175,8.375 57.15,8.375 ; C11.1 57.175,8.4 57.15,8.375 ; R12.2 59.525,8.375 R11.1 57.15,8.375
3V3_PRESS: C12.1 C25.1 C26.1 C30.1 C33.1 DA4.5 DA5.5 DA8.5 DA9.5 R25.2 VT4.1 | length 65.4
  Top Layer w0.3: DA8.5@10.65,8.55 11.7,8.55 12.1,8.95 C33.1@12.1,10.2 ; C25.1@14.85,10.25 15.4,10.25 15.65,10 15.65,9.5 15.95,9.2 DA4.5 ; DA9.5 28.75,8.55 29.15,8.95 C26.1@29.15,10.2 ; C12.1@31.9,10.25 32.45,10.25 32.7,10 32.7,9.5 33,9.2 DA5.5
  Top Layer w0.5: C33.1@12.1,10.2 12.05,10.25 12.05,12.75 12.65,13.35 12.9,13.35 15.55,13.35 ; C25.1@14.75,10.25 14.75,12.55 15.55,13.35 ; C26.1@29.15,10.2 29.05,10.3 29.05,12.559 29.841,13.35 ; C12.1@31.8,10.25 C12.1 31.8,12.3 32.85,13.35 ; C30.1@46.83,13 47.53,12.3 ; v1(49.7,12.3) 47.53,12.3 ; 15.55,13.35 15.8,13.35 29.841,13.35 ; 29.841,13.35 32.85,13.35 ; 32.85,13.35 39.15,13.35 40.775,11.725 46.955,11.725 47.53,12.3
  Bottom Layer w0.5: R25.2@47.85,12 R25.2 48.6,12 48.9,12.3 v1(49.7,12.3)
3V3_TEMP: C14.1 C27.1 C28.1 C32.1 C34.1 DA6.5 DA7.5 DA10.5 DA11.5 R27.2 VT5.1 | length 66
  Top Layer w0.3: DA10.5 11.75,1.65 12.15,2.05 C14.1@12.15,3.3 ; C27.1 15.45,3.35 15.7,3.1 15.7,2.6 16,2.3 DA6.5 ; DA11.5@27.7,1.65 28.75,1.65 29.05,1.95 C28.1@29.05,3.2 ; C28.1@29,3.15 C28.1@29.05,3.2 ; C28.1@29.05,3.4 C28.1@29.05,3.2 ; C28.1@29.15,3.3 C28.1@29.05,3.2 ; C34.1@31.9,3.35 32.45,3.35 32.7,3.1 32.7,2.6 33,2.3 DA7.5
  Top Layer w0.5: C14.1@12.1,3.35 12.05,3.4 12.05,5.8 12.7,6.45 ; 12.8,6.5 39.7,6.5 41.53,4.67 VT5.1 48.67,4.67 49.1,5.1 v1(49.1,5.9) C32.1@47,5.9 ; C27.1 14.9,5.4 15.975,6.475 ; C28.1@29.05,3.4 29.05,5.659 29.841,6.45 ; C34.1 31.8,5.4 32.85,6.45
  Bottom Layer w0.5: R27.2@47.85,5.9 R27.2 v1(49.1,5.9)
30V: C1.1 C2.1 R1.2 VD2.2 VT1.3 | length 21.9
  Top Layer w0.5: VT1.3@82.7,11.5 82.7,9.05 85.5,6.25 87.4,6.25 C1.1@87.9,5.75 ; C1.1@87.9,5.95 90.3,5.95 ; R1.2 89.6,4.3 90.3,5 90.3,5.95 ; VD2.2 93.4,8.3 92.8,7.7 C2.1 92.8,5.95 90.3,5.95
+5V: C3.1 C6.1 C8.1 C29.1 C31.1 DA1.1 DA12.1 DA13.1 R4.2 VT1.1 VT2.3 VT4.3 VT5.3 | length 112.4
  Top Layer w0.3: C3.1@71.45,11.6 71.45,11.15 71.7,10.9 DA1.1 ; 75.9,12.8 76.52,12.18 VT2.3@76.52,11.5
  Top Layer w0.5: VT5.3 v1(49.751,2.13) ; VT4.3 v1(49,8.7) ; v1@69.3,6.4 76.3,6.4 v1(78.7,8.8) 78.7,11.8 77.7,12.8 ; C3.1@71.45,11.6 71.45,12.35 71.9,12.8 75.9,12.8 77.7,12.8 ; R4.2@84.9,3.185 80.16,7.925 VT1.1 80.16,12.34 79.7,12.8 77.7,12.8 ; R4.2@85.375,3.15 85.325,3.2 R4.2
  Bottom Layer w0.5: C31.1@42.1,2.25 DA13.1 43.7,1.3 44.4,0.6 51.281,0.6 ; C29.1@42.1,8.65 C29.1 42.1,7.9 42.6,7.4 44.2,7.4 ; DA12.1 43.7,7.9 44.2,7.4 ; v1(49,8.7) 50.25,7.45 50.25,7.4 ; 50.3,7.4 50.25,7.4 ; C8.1@52.4,4.25 52.1,3.95 52.1,2.8 54.3,0.6 ; v1@69.35,6.45 69.35,6.15 69.85,5.65 69.85,3.85 67.6,1.6 65.85,1.6 64.85,0.6 54.3,0.6 ; v1(78.7,8.8) 86.9,8.8 87.75,7.95 C6.1 ; 44.2,7.4 50.25,7.4 ; 50.25,7.4 50.25,2.629 v1(49.751,2.13) 51.281,0.6 ; 51.281,0.6 54.3,0.6
  other v1: 69.1,6.4
Cabel_Divider: C9.1 DA3.23 DA3.59 R2.1 R6.2 | length 59.3
  Top Layer w0.3: v1(57.7,3.8) 57.7,4.075 58.75,5.125 DA3.59 58.75,13.275 58.75,13.32 58.97,13.54 82.46,13.54 85.8,10.2 R2.1 97.5,11.25 97.75,11.5 98.4,11.5 98.65,11.75 R6.2@98.65,12.4 ; DA3.23 59.25,3.15 v1@59.8,3.7
  Bottom Layer w0.3: v1(57.7,3.8) v1@59.8,3.8 ; C9.1 59.8,4 v1(60,3.8)
GND: C1.2 C2.2 C3.2 C5.2 C6.2 C8.2 C9.2 C10.2 C11.2 C12.2 C13.2 C14.2 C15.2 C25.2 C26.2 C27.2 C28.2 C29.2 C30.2 C31.2 C32.2 C33.2 C34.2 DA1.2 DA1.3 DA2.5 DA3.10 DA3.11 DA3.53 DA3.62 DA3.63 DA4.1 DA4.2 DA5.1 DA5.2 DA6.1 DA6.2 DA7.1 DA7.2 DA8.3 DA9.3 DA10.3 DA11.3 DA12.2 DA12.3 DA13.2 DA13.3 E2.1 E15.1 E16.1 E20.1 R6.1 R7.1 R8.1 R10.1 R22.1 R26.1 R28.1 VD10.1 VD14.2 VT3.2 | length 233.4
  Top Layer w0.3: v1(7.85,9.5) 8.425,9.5 9.35,10.425 DA8.3@9.35,10.65 ; v1(8.05,2.6) 8.4,2.6 DA10.3@9.55,3.75 ; DA4.1 19.3,8.55 v1(19.95,9.2) ; DA4.2 v1(19.95,9.2) ; DA6.1@18.7,1.65 19.5,1.65 v1(20.15,2.3) ; DA6.2@18.7,2.3 v1(20.15,2.3) ; v1@20.15,9.2 v1(19.95,9.2) ; v1@20.35,2.3 v1(20.15,2.3) ; v1(24.9,2.55) 25.525,2.55 26.4,3.425 DA11.3@26.4,3.7 ; v1(24.9,9.5) 25.25,9.5 DA9.3 ; DA7.1 36.35,1.65 v1@37,2.3 ; DA7.2 v1@37,2.3 ; DA5.1 36.95,8.55 v1@37.1,8.7 ; DA5.2 36.6,9.2 v1@37.1,8.7 ; v1(37.2,2.3) v1@37,2.3 ; v1@37.2,9 v1(37.2,8.6) v1@37.1,8.7 ; DA3.11 56.1,5.75 ; DA3.10 55.6,6.25 56.1,5.75 ; v1(56.075,5.125) 56.075,5.725 56.1,5.75 ; DA3.63 56.75,11.8 v1@57.25,11.3 ; v1(57.2,11.25) v1@57.25,11.3 ; DA3.62 v1@57.25,11.3 ; DA3.53 61.75,11.85 61.95,11.65 64.1,11.65 64.826,12.376 v1(65.328,12.376) 65.978,13.025 69.375,13.025 69.95,12.45 69.95,11.6 70,11.55 70,11.1 69.8,10.9 DA1.3 DA1.2 ; v1@67.25,4.95 68.2,4 70.675,4 70.7,3.975 ; VD14.2 70.4,2.725 70.7,3.025 70.7,3.975 ; 70.8,4.025 70.75,4.025 70.7,3.975
  Top Layer w0.5: C14.2@13.6,3.3 13.55,3.25 v1(13.55,1.85) C27.2@14.75,1.85 ; C33.2 13.55,10.15 v1(13.55,8.75) C25.2 ; C27.2@14.894,1.842 C27.2@14.95,1.85 ; C28.2@30.65,3.3 30.6,3.25 v1(30.6,1.95) 30.6,1.85 C34.2@31.8,1.85 ; C26.2@30.65,10.2 30.6,10.15 v1(30.6,8.75) C12.2@31.8,8.75 ; v1(41.8,5.9) C32.2@45.1,5.9 ; v1(41.8,13) C30.2 ; v1@67.25,4.95 R8.1@67.25,7.7 ; DA1.2 70.75,9.25 71.1,8.9 72.6,8.9 72.825,9.125 v1@72.825,9.425 ; 70.8,4.025 78.075,4.025 v1(78.2,4.15) 79.65,4.15 82.24,1.56 E20.1 ; C1.2@87.725,12.425 87.9,12.25 87.8,12.25 88,12.05 88.45,12.5 v1(90.3,12.5) v1(95.7,12.5) 97.05,12.5 R6.1@97.15,12.4 ; DA2.5 94.75,3.75 94.95,3.55 95.5,3.55 R7.1 v1(95.5,5.8) ; v1@101.3,8 v1@101.5,8.2 ; v1(101.4,8.3) 101.4,10.5 103.4,12.5 103.4,9.45 VD10.1@103.5,9.35
  Bottom Layer w0.3: v1(56.075,5.125) 56.95,6 58.175,6 ; v1@57.25,11.65 C15.2@57.25,12.4 ; C9.2 58.2,5.975 58.175,6 ; C13.2 59.7,6.05 59.75,6 ; v1@67.1,4.825 62.825,4.825 61.65,6 59.75,6 ; 58.175,6 59.75,6
  Bottom Layer w0.5: E16.1@3.1,2.7 E16.1 4.9,2.6 ; E15.1 4.7,10 5.4,10 ; C31.2@42.1,3.75 42.75,3.75 43.15,4.15 DA13.3 ; C29.2@42.1,10.15 42.65,10.15 43.05,10.55 DA12.3 ; 43.5,13.4 51.2,13.4 52.1,12.5 C8.2 52.471,10.279 54.375,10.279 ; R28.1@43.55,5.6 43.55,4.95 43.7,4.8 DA13.3 ; R26.1@43.55,12 43.55,11.35 43.8,11.1 43.8,10.65 DA12.3 ; DA13.2 DA13.3 ; DA12.2 DA12.3 ; C10.2 55.95,5.25 v1(56.075,5.125) 55.675,5.125 54.95,5.85 54.95,7.425 54.375,8 54.375,10.279 ; C11.2 58.775,11.225 58.75,11.25 ; v1(65.328,12.376) 65.304,12.4 61.175,12.4 60.025,11.25 58.75,11.25 ; 75.7,12 v1(73.025,9.325) 76.6,5.75 ; v1(78.2,4.15) 76.6,5.75 ; C5.2@79.7,5.75 76.6,5.75 ; C5.2@79.7,5.8 81.65,5.8 83.3,4.15 ; E20.1 82.24,3.54 82.85,4.15 83.3,4.15 ; R10.1@86,3.15 86.65,3.15 VT3.2 87.75,4.15 ; v1(90.3,12.5) 90.3,6.1 ; v1@95.5,5.5 v1(95.5,5.8) 95.5,6.8 ; R22.1@98.5,4.1 100.1,4.1 101.3,5.3 ; v1(101.4,8.3) 101.4,5.4 101.3,5.3 ; 54.375,10.279 54.375,11.1 54.525,11.25 v1(57.2,11.25) 58.75,11.25 ; 83.3,4.15 87.75,4.15 ; 87.75,4.15 89.25,4.15 90.3,5.2 90.3,6.1 ; 90.3,6.1 91,6.8 95.5,6.8 ; 95.5,6.8 96.5,6.8 98,5.3 101.3,5.3
  Bottom Layer w1: 40,6.1 40,7.8
  other v1: 67.25,4.825
JK: E1.1 VD1.1 VD10.2 | length 11.3
  Top Layer w0.8: VD1.1 97.7,2.8 98.2,3.3 101.6,3.3 103.4,1.5 VD10.2@103.4,4.85
JK_IN: R2.2 VD1.2 VD2.1 VD3.2 | length 12.1
  Top Layer w0.5: R2.2 VD2.1 98.7,8.3 97.7,7.3 VD1.2 98.95,6.05 v1(99.7,6.8)
  Bottom Layer w0.5: VD3.2 98.75,8.75 99.7,7.8 v1(99.7,6.8) v1@99.7,6.6
LOG_DRV_PRESS_REF_X1: DA5.4 E5.1 | length 2.2
  Top Layer w0.4: DA5.4 E5.1
LOG_DRV_PRESS_REF_X2: E6.1 VD6.1 VD6.2 | length 4.4
  Bottom Layer w0.3: E6.1@30,12.4 E6.1
  Bottom Layer w0.5: VD6.2 VD6.1 30.05,11.65 E6.1
LOG_DRV_PRESS_X1: DA4.4 E3.1 | length 2.2
  Top Layer w0.4: DA4.4 16.55,11.95 E3.1
LOG_DRV_PRESS_X2: E4.1 VD4.1 VD4.2 | length 4.5
  Bottom Layer w0.3: E4.1@13,12.4 E4.1
  Bottom Layer w0.5: VD4.2 VD4.1 13.05,11.65 E4.1
LOG_DRV_TEMP_REF_X1: DA7.4 E9.1 | length 2.2
  Top Layer w0.4: DA7.4 E9.1
LOG_DRV_TEMP_REF_X2: E10.1 VD11.1 VD11.2 | length 4.4
  Bottom Layer w0.3: E10.1@30,5.5 E10.1
  Bottom Layer w0.5: VD11.2 VD11.1 30.05,4.75 E10.1
LOG_DRV_TEMP_X1: DA6.4 E7.1 | length 2.1
  Top Layer w0.4: DA6.4 E7.1
LOG_DRV_TEMP_X2: E8.1 VD9.1 VD9.2 | length 4.5
  Bottom Layer w0.3: E8.1@13,5.5 E8.1
  Bottom Layer w0.5: VD9.2 VD9.1 13.05,4.75 E8.1
MSP: DA3.22 DA3.40 | length 10.6
  Top Layer w0.3: DA3.22 58.75,3.894 59.781,4.925 61.825,4.925 63.65,6.75 DA3.40
MSP_EN: DA3.39 R9.1 | length 24.1
  Top Layer w0.3: v1@64.025,5.7 64.575,6.25 DA3.39 ; v1(68.8,5) 68.9,5.1 81.5,5.1 v1(83.5,3.1)
  Bottom Layer w0.3: v1(64.025,5.775) 68.025,5.775 v1(68.8,5) v1@69,5 ; v1(83.5,3.1) R9.1@84.9,3.1
MSP_TCK: DA3.57 E23.1 VD14.1 | length 26.8
  Top Layer w0.3: DA3.57 59.75,8.906 60.556,8.1 63.55,8.1 v1(63.6,8.15) ; E23.1@69.4,0.78 69.4,1.15 68.7,1.85 68.7,2.975 69.1,3.375 VD14.1
  Bottom Layer w0.3: v1@63.6,8.1 69.5,8.1 71.1,6.5 71.1,3.125 69.54,1.565 E23.1
MSP_TDI: DA3.55 E19.1 VD14.4 | length 26.8
  Top Layer w0.3: DA3.55 60.75,10.65 60.9,10.5 v1@61.4,10.5 ; VD14.4 73.725,2.075 74.62,1.18 E19.1@74.62,0.46
  Bottom Layer w0.3: v1(61.2,10.2) 62.8,10.2 63.25,9.75 69.357,9.75 72.2,6.907 72.2,3.7 74.48,1.42 E19.1@74.48,0.14
MSP_TDO: DA3.54 E18.1 VD14.5 | length 30
  Top Layer w0.3: DA3.54 61.25,11.55 62.1,10.7 v1(64,10.7) ; VD14.5 73.606,3.375 76.521,0.46 E18.1@77.16,0.46
  Bottom Layer w0.3: v1(64,10.7) 69.114,10.7 72.9,6.914 72.9,4.26 E18.1
MSP_TMS: DA3.56 E21.1 VD14.3 | length 25.4
  Top Layer w0.3: DA3.56 60.25,9.75 60.925,9.075 v1(62.4,9.075) ; VD14.3 69.6,1.657 69.832,1.425 70.655,1.425 E21.1@71.62,0.46
  Bottom Layer w0.3: v1(62.4,9.075) 62.425,9.1 69.3,9.1 71.7,6.7 71.7,3.1 72.08,2.72 E21.1
NetC4_1: C4.1 DA2.3 R1.1 VT1.2 | length 16.4
  Top Layer w0.5: VT1.2@81.43,11.5 VT1.2 81.43,8.42 85.575,4.275 86.525,4.275 87,3.8 C4.1 87.1,3.1 87.775,3.1 88.05,2.825 88.05,2.45 88.7,1.8 R1.1 ; R1.1@89.6,1.9 89.65,1.85 DA2.3
NetC4_2: C4.2 DA2.4 R4.1 R7.2 | length 11.5
  Top Layer w0.5: R4.1 C4.2 88,0.6 93.3,0.6 94,1.3 DA2.4 94.65,1.85 94.85,2.05 R7.2@95.5,2.05
NetC17_1: C17.1 DA4.3 | length 1.1
  Top Layer w0.3: DA4.3 C17.1 C17.1@18.5,10.95
NetC17_2: C17.2 R29.1 | length 1.4
  Top Layer w0.3: C17.2@18.5,12.45 R29.1@19.9,12.45
NetC18_1: C18.1 DA5.3 | length 1.1
  Top Layer w0.3: DA5.3 35.6,9.9 C18.1 C18.1@35.6,10.95
NetC18_2: C18.2 R30.1 | length 1.4
  Top Layer w0.3: C18.2@35.6,12.45 R30.1@37,12.45
NetC19_1: C19.1 DA6.3 | length 1.2
  Top Layer w0.3: DA6.3@18.5,2.95 18.5,3.85 C19.1@18.7,4.05
NetC19_2: C19.2 R31.1 | length 1.4
  Top Layer w0.3: C19.2@18.7,5.55 R31.1@20.1,5.55
NetC20_1: C20.1 DA7.3 | length 1
  Top Layer w0.3: DA7.3@35.6,3 C20.1@35.6,4.05
NetC20_2: C20.2 R32.1 | length 1.4
  Top Layer w0.3: C20.2@35.6,5.55 R32.1@37,5.55
NetC21_1: C21.1 DA8.2 R35.1 VD4.3 | length 6.5
  Top Layer w0.3: R35.1@8.25,11.2 8.25,12.5 9.525,12.5 10.1,11.925 DA8.2
  Bottom Layer w0.5: VD4.3 v1(9.45,12.575)
NetC21_2: C21.2 DA8.4 R29.2 R35.2 | length 27.5
  Top Layer w0.3: v1(5.35,11.2) R35.2@6.75,11.2 ; C21.2@6.75,12.5 R35.2@6.75,11.2 ; DA8.4@9.35,8.55 7.2,8.55 6.75,9 R35.2@6.75,11.2 ; R29.2@19.9,10.95 20.75,10.95 21.3,11.5 v1(21.3,12.3)
  Bottom Layer w0.3: v1(5.35,11.2) 7.69,13.54 20.06,13.54 v1(21.3,12.3)
NetC22_1: C22.1 DA9.2 R13.1 VD6.3 | length 6.6
  Top Layer w0.3: v1@26.3,12.5 v1(26.5,12.3) 27.05,11.75 DA9.2
  Top Layer w0.5: R13.1 25.1,12.175 C22.1 26.425,12.225 v1(26.5,12.3)
  Bottom Layer w0.5: VD6.3 26.5,10.712 v1(26.5,12.3)
NetC22_2: C22.2 DA9.4 R13.2 R30.2 | length 27.8
  Top Layer w0.3: v1(22.4,11.2) R13.2@23.475,11.2 ; C22.2@23.475,12.175 R13.2@23.475,11.2 ; DA9.4 24.25,8.55 23.475,9.325 R13.2@23.475,11.2 ; R30.2@37,10.95 v1(38.95,10.95) v1@38.9,10.9
  Bottom Layer w0.3: v1(22.4,11.2) 24.74,13.54 36.36,13.54 v1(38.95,10.95)
NetC23_1: C23.1 DA10.2 R14.1 VD9.3 | length 6.7
  Top Layer w0.3: C23.1@8.302,5.581 C23.1@8.3,5.6 ; R14.1@8.45,4.3 8.25,4.5 8.25,5.6 C23.1@8.3,5.6 ; DA10.2 10.15,5 9.55,5.6 C23.1@8.3,5.6
  Bottom Layer w0.5: VD9.3 9.5,3.85 v1(9.5,5.65)
NetC23_2: C23.2 DA10.4 R14.2 R31.2 | length 27.4
  Top Layer w0.3: v1(5.55,4.3) R14.2@6.75,4.3 ; R14.2@6.9,4.3 R14.2@6.75,4.3 ; C23.2@6.95,5.6 6.75,5.4 R14.2@6.75,4.3 ; DA10.4@9.55,1.65 7.4,1.65 6.75,2.3 R14.2@6.75,4.3 ; R31.2@20.1,4.05 20.825,4.05 21.3,4.525 v1(21.3,5.35)
  Bottom Layer w0.3: v1(5.55,4.3) 8.05,6.8 19.85,6.8 v1(21.3,5.35)
NetC24_1: C24.1 DA11.2 R15.1 VD11.3 | length 6.5
  Top Layer w0.3: v1@26.35,5.6 v1(26.5,5.45) 27.05,4.9 DA11.2@27.05,3.75
  Top Layer w0.5: R15.1 C24.1 26.425,5.375 v1(26.5,5.45)
  Bottom Layer w0.5: VD11.3 26.5,3.812 v1(26.5,5.45)
NetC24_2: C24.2 DA11.4 R15.2 R32.2 | length 28.2
  Top Layer w0.3: v1(22.4,4.3) 23.35,4.3 R15.2 ; C24.2 R15.2 ; DA11.4@26.4,1.65 26.35,1.6 24.3,1.6 23.8,2.1 23.8,3.85 R15.2 ; R32.2@37,4.05 v1(38.95,4.05) v1@38.9,4
  Bottom Layer w0.3: v1(22.4,4.3) 24.825,6.725 36.275,6.725 v1(38.95,4.05)
NetDA1_4: DA1.4 R5.1 R8.2 | length 4.1
  Top Layer w0.3: R5.1@68.75,10.775 68.75,8.15 68.75,7.7 R8.2 DA1.4
NetDA1_5: DA1.5 VT2.2 | length 6.8
  Top Layer w0.3: DA1.5 74.275,7.7 75.25,8.675 VT2.2 VT2.2@75.25,11.5
NetDA3_8: DA3.8 R11.2 | length 4.4
  Top Layer w0.3: DA3.8 55.75,7.25 55.85,7.35 v1(57.225,7.35)
  Bottom Layer w0.3: v1(57.225,7.35) 57.8,6.775 R11.2
NetDA3_34: DA3.34 E27.1 | length 1.4
  Top Layer w0.3: DA3.34 E27.1@67.05,3.75
NetDA3_44: DA3.44 E26.1 | length 1.4
  Top Layer w0.3: DA3.44 E26.1
NetDA3_45: DA3.45 E25.1 | length 1.5
  Top Layer w0.3: DA3.45 66.32,9.25 66.57,9.5 E25.1
NetDA3_47: DA3.47 E24.1 | length 1.4
  Top Layer w0.3: DA3.47 E24.1
NetDA12_4: DA12.4 R25.1 R26.2 | length 2.7
  Bottom Layer w0.5: R26.2@45.05,12 R26.2 R25.1 DA12.4
NetDA12_5: DA12.5 VT4.2 | length 6.2
  Top Layer w0.5: VT4.2 49.32,9.97 v1(49.45,10.1)
  Bottom Layer w0.5: DA12.5 47.05,8.65 48.5,10.1 v1(49.45,10.1)
NetDA13_4: DA13.4 R27.1 R28.2 | length 3.1
  Bottom Layer w0.5: R28.2@45.05,5.9 R28.2 R27.1 46.35,5.9 46.35,4.2 DA13.4
NetDA13_5: DA13.5 VT5.2 | length 5.1
  Top Layer w0.5: VT5.2 v1(49,3.4)
  Bottom Layer w0.5: DA13.5 47.85,2.25 v1(49,3.4)
NetR9_2: R9.2 R10.2 VT3.1 | length 3.1
  Bottom Layer w0.3: R9.2@84.9,1.65 86.575,1.65 86.975,1.25 87.55,1.25 VT3.1@87.75,1.05
NetR22_2: R22.2 VD12.1 | length 2
  Bottom Layer w0.5: VD12.1@96.5,0.9 96.55,0.95 R22.2@98.5,0.95
NetVD3_1: VD3.1 VD13.2 | length 1.9
  Bottom Layer w0.5: VD13.2@91.75,8.6 93.55,8.6 VD3.1@93.65,8.5
NetVD7_1: VD7.1 VD8.2 | length 2
  Bottom Layer w0.8: VD7.1@92.1,0.9 VD8.2
NetVD7_2: VD7.2 VD13.1 VT3.3 | length 4.5
  Bottom Layer w0.5: VT3.3 89.85,3.25 90.7,4.1 VD7.2 VD13.1@91.75,5.25
NetVD8_1: VD8.1 VD12.2 | length 2.4
  Bottom Layer w0.5: VD8.1 VD12.2 VD12.2@96.5,4.1
Press: DA3.13 DA3.14 E32.1 | length 3.8
  Top Layer w0.3: E32.1 52.8,4.55 53,4.75 53.025,4.75 ; DA3.14 53.525,4.25 53.025,4.75 ; DA3.13 53.025,4.75
PRESS_REF_SCK: DA5.6 E12.1 R23.1 | length 30.2
  Top Layer w0.3: E12.1 23.4,7.6 34,7.6 ; DA5.6 33.6,8 34,7.6 ; R23.1@50.25,8.5 49.35,7.6 34,7.6
PRESS_REF_SCK_MCU: DA3.28 R23.2 | length 16.5
  Top Layer w0.3: R23.2@51.75,8.5 R23.2 v1(52.9,8.5) ; DA3.28 v1(61.75,2.8) v1@61.75,2.9
  Bottom Layer w0.3: v1(52.9,8.5) 54.3,7.1 54.3,3.4 55.4,2.3 61.15,2.3 v1@61.75,2.9
PRESS_SIMO: DA4.6 E11.1 R33.1 | length 46.7
  Top Layer w0.3: E11.1 7,7.1 17.3,7.1 ; DA4.6 16.55,7.85 17.3,7.1 ; R33.1@50.25,7.1 R33.1 17.3,7.1
PRESS_SIMO_MCU: DA3.32 R33.2 | length 18.6
  Top Layer w0.3: R33.2@51.75,7.1 R33.2 v1(52.9,7.1) ; DA3.32 63.75,2.05 64.15,2.45 v1(64.15,3.05)
  Bottom Layer w0.3: v1(52.9,7.1) 53.8,6.2 53.8,2.925 55.125,1.6 62.4,1.6 v1@63.75,2.95
R\S\T\: C13.1 DA3.58 E22.1 R12.1 | length 27.2
  Top Layer w0.3: DA3.58 59.25,8.55 60.9,6.9 62.404,6.9 v1(62.429,6.925)
  Bottom Layer w0.3: C13.1@61.25,6.9 C13.1 v1@62.429,6.9 ; R12.1@61.25,8.1 61.957,8.1 62.5,7.556 ; v1@62.5,6.9 66.4,6.9 67,7.5 69.344,7.5 70.6,6.244 70.6,3.6 E22.1
Ref: DA3.12 E31.1 | length 2.2
  Top Layer w0.3: E31.1 53.025,5.4 53.175,5.25 DA3.12
Temp: DA3.15 E33.1 | length 2.1
  Top Layer w0.3: E33.1 52.275,3.75 DA3.15
TEMP_REF_SCK: DA7.6 E14.1 R24.1 | length 31.3
  Top Layer w0.3: E14.1 23.34,0.96 33.86,0.96 ; DA7.6 33.6,1.3 33.9,1 33.86,0.96 ; R24.1@51.45,2.4 50.01,0.96 33.86,0.96
TEMP_REF_SCK_MCU: DA3.31 R24.2 | length 14.1
  Top Layer w0.3: R24.2@52.95,2.4 R24.2 55.125,2.4 56.075,3.35 v1(56.075,3.675) ; v1(62.8,3.8) 62.8,2.9 63.25,2.45 DA3.31
  Bottom Layer w0.3: v1(56.075,3.675) 56.075,3.35 56.625,2.8 60.406,2.8 61.356,3.75 62.45,3.75 v1@62.7,4
TEMP_SIMO: DA6.6 E13.1 R34.1 | length 47.8
  Top Layer w0.3: E13.1 6.84,0.46 17.24,0.46 ; DA6.6 16.6,1.1 17.24,0.46 ; R34.1@51.45,1 R34.1 50.757,1 50.217,0.46 17.24,0.46
TEMP_SIMO_MCU: DA3.29 R34.2 | length 10.3
  Top Layer w0.3: R34.2@52.95,1 R34.2 53.6,1 54.125,0.475 62.045,0.475 62.25,0.68 DA3.29
pads on no net: DA2.1 DA2.2 DA3.2 DA3.3 DA3.4 DA3.5 DA3.6 DA3.7 DA3.9 DA3.16 DA3.17 DA3.18 DA3.19 DA3.20 DA3.21 DA3.24 DA3.25 DA3.26 DA3.27 DA3.30 DA3.33 DA3.35 DA3.36 DA3.37 DA3.38 DA3.41 DA3.42 DA3.43 DA3.46 DA3.48 DA3.49 DA3.50 DA3.51 DA3.52 DA3.60 DA3.61 DA8.1 DA9.1 DA10.1 DA11.1 E1.2 E2.2

## Polygon pours and split planes (outlines as drawn)
GND on Bottom Layer "BOTTOM_GND" (solid, remove dead copper, pour order 6): 73.8,13.7 98.17,13.7 99.4,13.7 102,10.6 104.3,10.6 104.3,7.5 100.8,7.5 100.8,10 93.3,10 93.3,7.1 93.3,10 74.2,10 73.8,10
GND on Bottom Layer "GND" (solid, pour order 8): 4.7,7.3 44.4,7.3 44.4,10.2 44.4,13.7 37.3,13.7 37.3,11 4.7,11
GND on Bottom Layer "GND" (solid, pour order 10): 4.7,0.4 44.4,0.4 44.4,3.3 44.4,6.7 37.3,6.7 37.3,4.1 4.7,4.1

## Keep-outs
Keep-Out Layer:
  lines w0.1: 65.875,0.25 0.25,0.25 0.25,3.75 1.5,3.75 ccw(c1.5,7) 1.5,10.25 0.25,10.25 0.25,13.75 109.75,13.75 109.75,0.25 86.225,0.25 ; 83.375,0.25 84.275,0.25 ; 84.281,0.248 cw(c85.25,0) 86.219,0.248

## Other copper
Top Layer:
  text "A" at 1,12.5 h1
  text "ММС" at 0.25,1.15 h1
  text "122021" at 1.7,0.35 h1
  text "3K" at 0.4,0.325 h1
Bottom Layer:
  pour cut-out: 93.75,9.75 93.75,7.75 96.75,7.75 96.75,9.75
  text "B" at 1,12.5 h1

## Silkscreen, mask and mechanical layers (free items; w line width, h text height)
Top Overlay:
  lines w0.1: 12.3,4 12.3,6.8 13.725,6.8 16.375,6.8 17.7,6.8 17.7,4 12.3,4 ; 12.3,10.9 12.3,13.7 13.725,13.7 16.375,13.7 17.7,13.7 17.7,10.9 12.3,10.9 ; 29.3,4 29.3,6.8 30.725,6.8 33.375,6.8 34.7,6.8 34.7,4 29.3,4 ; 29.3,10.9 34.7,10.9 34.7,13.7 33.375,13.7 30.725,13.7 29.3,13.7 29.3,10.9
  lines w0.25: 54.5,2.4 54.5,1.6 55.4,1.6 ; 64.5,12.4 65.4,12.4 65.4,11.6 ; 64.6,1.6 65.5,1.6 65.5,2.4 ; 77.79,1.983 77.79,3.3 ; 77.79,4.8 77.79,7.19 ; 83.97,1.983 83.97,2.47 ; 83.97,3.7 83.97,7.19
Bottom Overlay:
  lines w0.1: 105.5,6.25 105.5,6.25
Mechanical 1:
  circle w0.254: c107.5,2 r1.6
  circle w0.254: c107.5,12 r1.6
  lines w0.254: 95.5,9.75 97,9.75
Mechanical 2:
  lines w0.254: 76.475,11.2 77.625,11.2 ; 93.75,1.75 95.25,1.75 ; 95.75,3.25 97.25,3.25
Mechanical 3:
  lines w0.2: 0,0 2,0 84.49,0 cw(c85.24,0) 85.99,0 110,0 110,14 0,14 0,10 1.5,10 cw(c1.5,7) 1.5,4 0,4 0,0

## Text inside footprints (layer, text, board x,y; h text height)
C1: Mechanical 1 "+" at 88.05,7.25 h1 r90; Top Overlay "+" at 86,4.5 h1 r90
C2: Mechanical 1 "+" at 93.25,7.25 h1 r90; Top Overlay "+" at 91.2,4.5 h1 r90
C6: Mechanical 2 "+" at 87.3,7.3 h1 r270; Bottom Overlay "+" at 89.35,4.55 h1 r270
C8: Mechanical 2 "+" at 51.65,5.65 h1 r270; Bottom Overlay "+" at 53.7,2.9 h1 r270
DA1: Mechanical 1 "1" at 71.4,9.6 h1 r270; Mechanical 1 "5" at 71.4,8.7 h1 r270
DA2: Mechanical 1 "1" at 92.1,3.45 h1; Mechanical 1 "5" at 93,3.45 h1
DA3: Mechanical 1 "1" at 55.265,10.538 h1; Mechanical 1 "64" at 55.9,11.3 h1
DA4: Mechanical 1 "6" at 16.525,7.5 h1 r90
DA5: Mechanical 1 "6" at 33.575,7.5 h1 r90
DA6: Mechanical 1 "6" at 16.575,0.6 h1 r90
DA7: Mechanical 1 "6" at 33.575,0.6 h1 r90
DA8: Mechanical 1 "5" at 11.8,8.6 h1 r180
DA9: Mechanical 1 "5" at 28.75,8.6 h1 r180
DA10: Mechanical 1 "5" at 11.85,1.7 h1 r180
DA11: Mechanical 1 "5" at 28.75,1.75 h1 r180
DA12: Mechanical 2 "1" at 44.4,8.95 h1 r180; Mechanical 2 "5" at 45.3,8.95 h1 r180
DA13: Mechanical 2 "1" at 44.4,2.55 h1 r180; Mechanical 2 "5" at 45.3,2.55 h1 r180
VD14: Mechanical 1 "5" at 71.65,4.425 h1 r270
VT1: Mechanical 1 "3" at 82.469,5.814 h1; Mechanical 1 "2" at 81.049,5.793 h1; Mechanical 1 "1" at 79.802,5.814 h1
VT2: Mechanical 1 "3" at 76.289,5.814 h1; Mechanical 1 "2" at 74.869,5.793 h1; Mechanical 1 "1" at 73.622,5.814 h1
VT4: Mechanical 1 "3" at 41.914,8.931 h1 r270; Mechanical 1 "2" at 41.893,10.351 h1 r270; Mechanical 1 "1" at 41.914,11.598 h1 r270
VT5: Mechanical 1 "3" at 41.914,2.361 h1 r270; Mechanical 1 "2" at 41.893,3.781 h1 r270; Mechanical 1 "1" at 41.914,5.028 h1 r270